# Altium PCB cs301_YourGroupNumber--4 holes.PcbDoc
Units mm, origin at the board's own origin, x right, y up, seen from the top; angles counter-clockwise.
Board outline 274.95 x 168.53 mm, 2 copper layers (Top Layer, Bottom Layer); 115 components, 69 nets, 362 pads, 0 vias.
Unrouted connection lines stored in the file: 224.
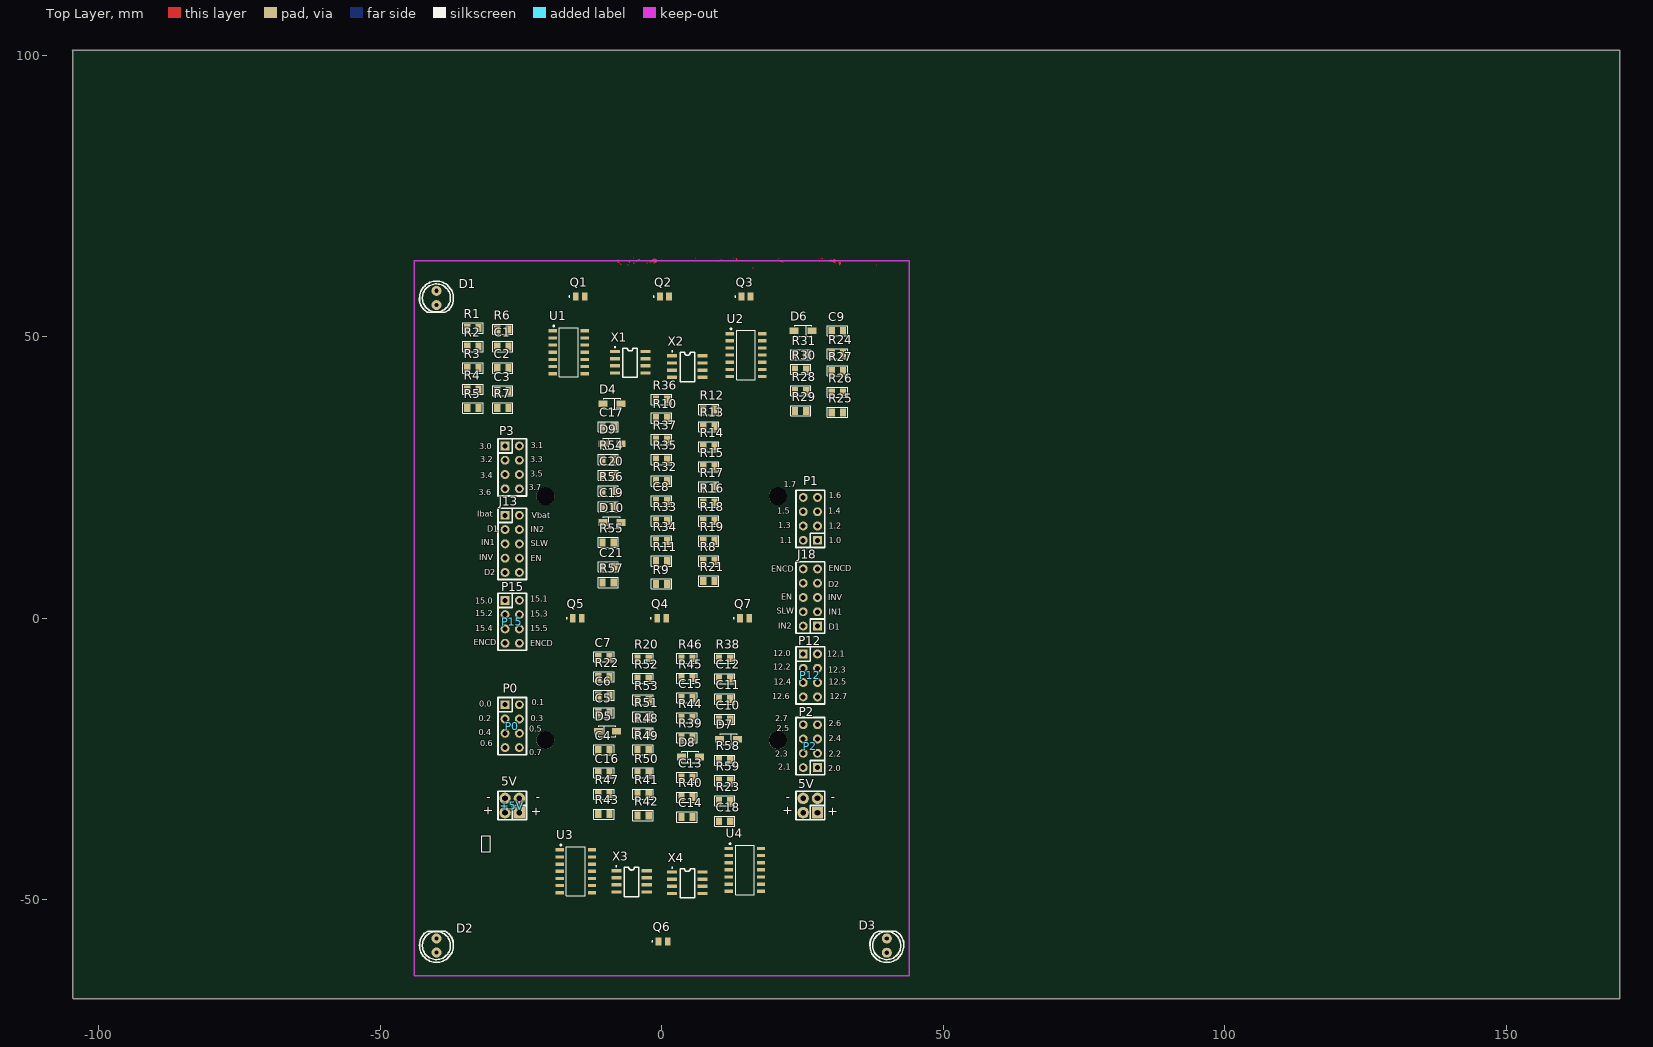
[diagram p0: Top Layer view]
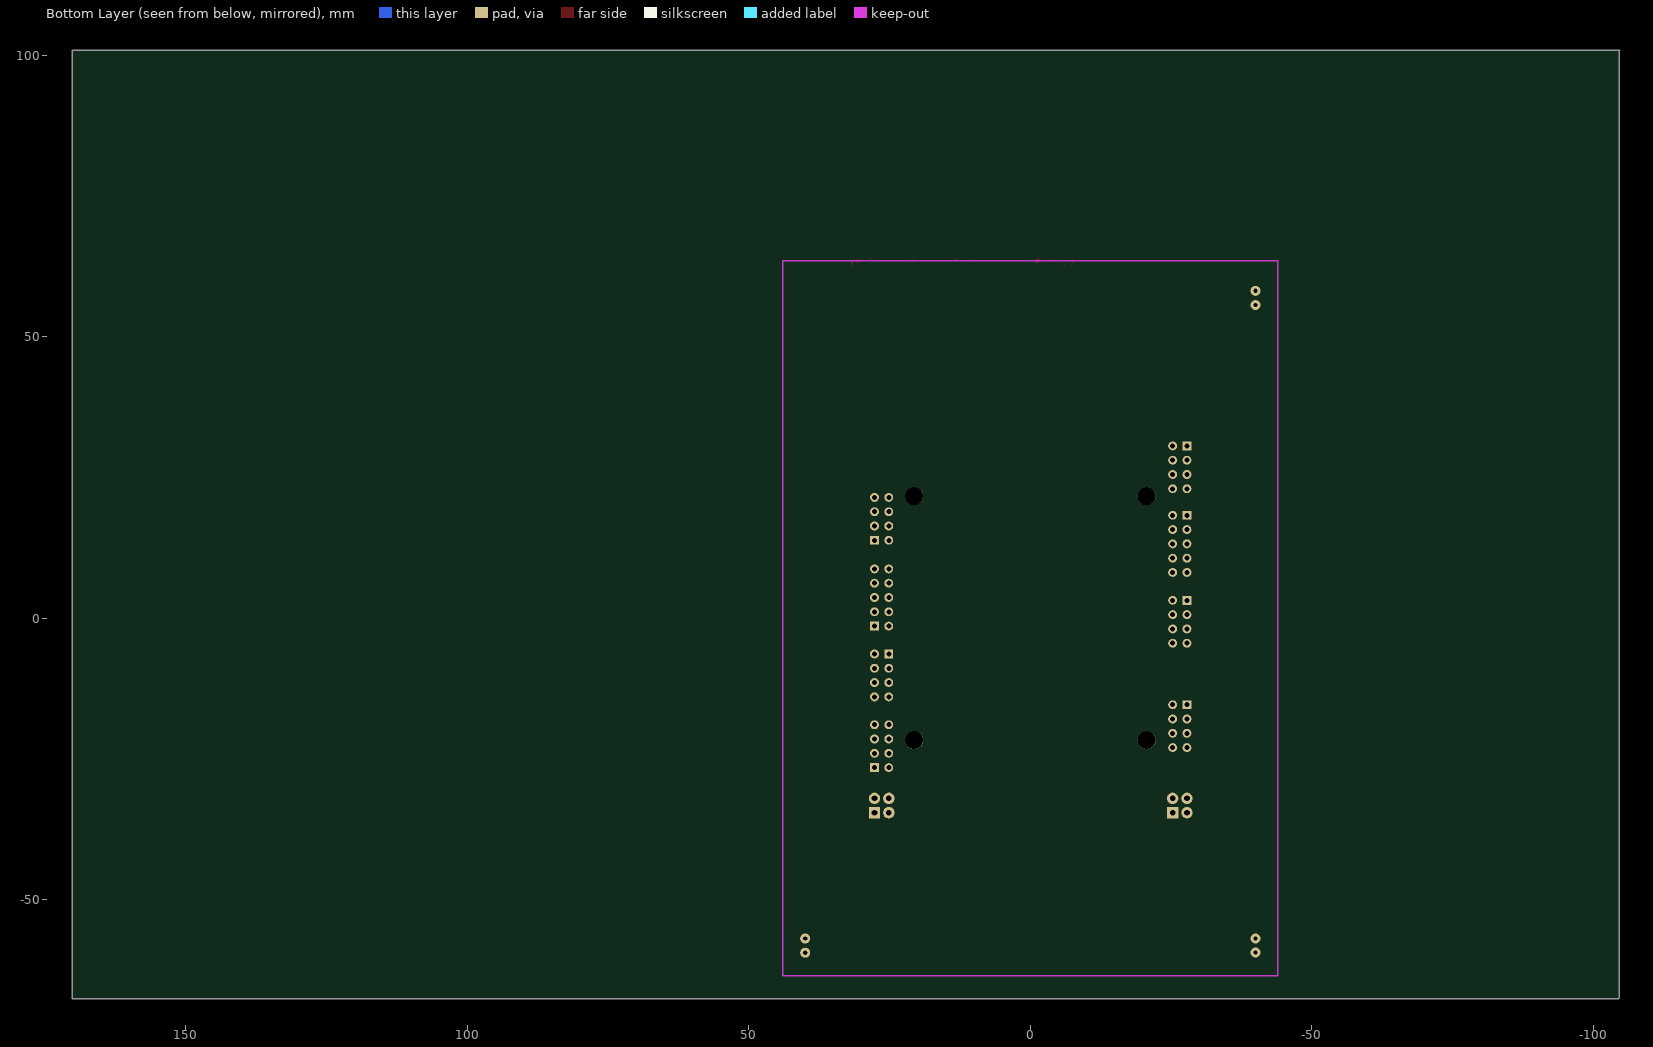
[diagram p1: Bottom Layer view, seen from below]

## Layer stack, top to bottom
Top Solder: solder mask 0.0102, Solder Resist, Dk 3.5
Top Layer: signal copper 0.0356
Dielectric1: dielectric 0.32, FR-4, Dk 4.8
Bottom Layer: signal copper 0.0356
Bottom Solder: solder mask 0.0102, Solder Resist, Dk 3.5

## Board outline
-104.6,-67.48 -104.473,-67.607 170.228,-67.607 170.228,100.922 -104.727,100.922 -104.6,100.795 -104.6,-67.48

## Design rules (kind name [scope] priority, off if disabled: settings)
Clearance [All] p1: gap=0.254 ignorepadtopadclearanceinfootprint=FALSE except(0: Arc-Hole Track-Hole SMDPad-Hole THPad-Hole Via-Hole Fill-Hole Poly-Hole Region-Hole Text-Hole)
PolygonConnect [All] p1: connectstyle=Relief reliefconductorwidth=0.508 reliefentries=4 polygonreliefangle="90 Angle" airgapwidth=0.254
RoutingVias [All] p1: holewidth=0.711 width=1.27 viastyle="Through Hole" minholewidth=0.711 minwidth=1.27 maxholewidth=0.711 maxwidth=1.27
SMDToCorner [All] p1: distance=157480
SilkToSolderMaskClearance SilkscreenOverComponentPads [IsPad] p1: minsilkscreentomaskgap=0.254 clearancetoexposedcopper=TRUE
SolderMaskExpansion [All] p1: expansion=0.102 istentingtop=FALSE
Width [All] p1: maxlimit=0.762 minlimit=0.254 preferedwidth=0.254 minimp=50.000000 maximp=50.000000 favimp=50.000000
29 further rules are at their usual default settings.

## Classes and differential pairs
component class Sensors: C7 C8 C9 C10 C11 C12 C13 C14 C15 C16 C17 C18 C19 C20 C21 D6 D7 D8 D9 D10 Q3 Q4 Q5 Q6 Q7 R20 R21 R22 R23 R24 R25 R26 R27 R28 R29 R30 R31 R32 R33 R34 R35 R36 R37 R38 R39 R40 R41 R42 R43 R44 R45 R46 R47 R48 R49 R50 R51 R52 R53 R54 R55 R56 R57 R58 R59 U2 U3 U4 X2 X3 X4

## Components (designator, comment, footprint, x,y, rotation, side; value= is the part's Value field where it differs from the comment)
5V "5V" IDC4 27.686,-34.544 r90 top locked
+5V "5V" IDC4 -25.273,-34.544 r90 top locked
C1 "*" "0805 CAP" -28.21,48.26 r0 top
C2 "*" "0805 CAP" -28.21,44.45 r0 top
C3 "*" "0805 CAP" -28.21,40.386 r0 top
C4 "*" "0805 CAP" -10.254,-23.368 r0 top
C5 "*" "0805 CAP" -10.254,-16.764 r0 top
C6 "*" "0805 CAP" -10.254,-13.716 r0 top
C7 "*" "0805 CAP" -10.254,-6.858 r0 top
C8 "*" "0805 CAP" -0.016,20.828 r0 top
C9 "*" "0805 CAP" 31.226,51.054 r0 top
C10 "*" "0805 CAP" 11.192,-17.97 r0 top
C11 "*" "0805 CAP" 11.192,-14.351 r0 top
C12 "*" "0805 CAP" 11.192,-10.731 r180 top
C13 "*" "0805 CAP" 4.504,-28.258 r0 top
C14 "*" "0805 CAP" 4.504,-35.306 r0 top
C15 "*" "0805 CAP" 4.504,-14.16 r0 top
C16 "*" "0805 CAP" -10.254,-27.432 r180 top
C17 "*" "0805 CAP" -9.492,34.036 r180 top
C18 "*" "0805 CAP" 11.192,-36.068 r0 top
C19 "*" "0805 CAP" -9.492,19.812 r0 top
C20 "*" "0805 CAP" -9.492,25.4 r180 top
C21 "*" "0805 CAP" -9.492,9.144 r180 top
D1 "LED" LED0.1/5MM#1 -40,55.62 r180 top locked
D2 "LED" LED0.1/5MM#2 -40,-56.88 r0 top locked
D3 "LED" LED0.1/5MM#1 40,-56.88 r0 top locked
D4 "BZT52H-B4V7" SOD123 -8.79,38.1 r0 top
D5 "BZT52H-B4V7" SOD123 -9.652,-20.066 r180 top
D6 "BZT52H-B4V7" SOD123 25.146,51.054 r0 top
D7 "BZT52H-B4V7" SOD123 11.894,-21.49 r0 top
D8 "BZT52H-B4V7" SOD123 5.106,-24.633 r180 top
D9 "BZT52H-B4V7" SOD123 -8.89,30.988 r180 top
D10 "BZT52H-B4V7" SOD123 -8.89,17.018 r180 top
J13 "CON10" IDC10 -27.813,18.288 r270 top locked
J18 "CON10" IDC10 27.686,-1.397 r90 top locked
P0 "P0" idc8 -27.813,-15.367 r270 top locked
P1 "P1" idc8 27.686,13.843 r90 top locked
P2 "P2" idc8 27.686,-26.543 r90 top locked
P3 "P3" idc8 -27.813,30.607 r270 top locked
P12 "P12" idc8 25.146,-6.35 r270 top locked
P15 "P15" IDC8 -27.813,3.175 r270 top locked
Q1 "TEMT6200FX01" XDCR_TEMT6200FX01 -14.478,57.15 r0 top locked
Q2 "TEMT6200FX01" XDCR_TEMT6200FX01 0.508,57.15 r0 top locked
Q3 "TEMT6200FX01" XDCR_TEMT6200FX01 14.986,57.15 r0 top locked
Q4 "TEMT6200FX01" XDCR_TEMT6200FX01 0,0 r0 top locked
Q5 "TEMT6200FX01" XDCR_TEMT6200FX01 -14.986,0 r0 top locked
Q6 "TEMT6200FX01" XDCR_TEMT6200FX01 0.254,-57.404 r0 top locked
Q7 "TEMT6200FX01" XDCR_TEMT6200FX01 14.732,0 r0 top locked
R1 "*" "0805 RES" -33.528,51.562 r180 top
R2 "*" "0805 RES" -33.528,48.26 r0 top
R3 "*" "0805 RES" -33.528,44.45 r180 top
R4 "*" "0805 RES" -33.528,40.64 r0 top
R5 "*" "0805 RES" -33.528,37.338 r0 top
R6 "*" "0805 RES" -28.21,51.308 r0 top
R7 "*" "0805 RES" -28.21,37.338 r0 top
R8 "*" "0805 RES" 8.382,10.16 r180 top
R9 "*" "0805 RES" -0.016,6.096 r0 top
R10 "*" "0805 RES" -0.016,35.56 r0 top
R11 "*" "0805 RES" -0.016,10.16 r0 top
R12 "*" "0805 RES" 8.382,37.084 r180 top
R13 "*" "0805 RES" 8.382,34.036 r180 top
R14 "*" "0805 RES" 8.382,30.48 r180 top
R15 "*" "0805 RES" 8.382,26.924 r180 top
R16 "*" "0805 RES" 8.382,20.574 r180 top
R17 "*" "0805 RES" 8.382,23.368 r180 top
R18 "*" "0805 RES" 8.382,17.272 r180 top
R19 "*" "0805 RES" 8.382,13.716 r180 top
R20 "*" "0805 RES" -3.302,-7.112 r180 top
R21 "*" "0805 RES" 8.382,6.604 r180 top
R22 "*" "0805 RES" -10.254,-10.414 r180 top
R23 "*" "0805 RES" 11.192,-32.448 r180 top
R24 "*" "0805 RES" 31.226,46.99 r180 top
R25 "*" "0805 RES" 31.226,36.576 r180 top
R26 "*" "0805 RES" 31.226,40.132 r180 top
R27 "*" "0805 RES" 31.226,43.942 r180 top
R28 "*" "0805 RES" 24.698,40.386 r0 top
R29 "*" "0805 RES" 24.698,36.83 r0 top
R30 "*" "0805 RES" 24.698,44.196 r180 top
R31 "*" "0805 RES" 24.698,46.82 r0 top
R32 "*" "0805 RES" -0.016,24.384 r0 top
R33 "*" "0805 RES" -0.016,17.272 r0 top
R34 "*" "0805 RES" -0.016,13.716 r180 top
R35 "*" "0805 RES" -0.016,28.194 r0 top
R36 "*" "0805 RES" -0.016,38.862 r0 top
R37 "*" "0805 RES" -0.016,31.75 r0 top
R38 "*" "0805 RES" 11.192,-7.112 r180 top
R39 "*" "0805 RES" 4.504,-21.209 r180 top
R40 "*" "0805 RES" 4.504,-31.782 r0 top
R41 "*" "0805 RES" -3.302,-31.242 r180 top
R42 "*" "0805 RES" -3.302,-35.052 r180 top
R43 "*" "0805 RES" -10.254,-34.798 r0 top
R44 "*" "0805 RES" 4.504,-17.685 r0 top
R45 "*" "0805 RES" 4.504,-10.636 r0 top
R46 "*" "0805 RES" 4.504,-7.112 r0 top
R47 "*" "0805 RES" -10.254,-31.242 r0 top
R48 "*" "0805 RES" -3.302,-20.32 r180 top
R49 "*" "0805 RES" -3.302,-23.368 r180 top
R50 "*" "0805 RES" -3.302,-27.432 r180 top
R51 "*" "0805 RES" -3.302,-17.526 r0 top
R52 "*" "0805 RES" -3.302,-10.668 r180 top
R53 "*" "0805 RES" -3.302,-14.478 r180 top
R54 "*" "0805 RES" -9.492,28.194 r180 top
R55 "*" "0805 RES" -9.492,13.462 r180 top
R56 "*" "0805 RES" -9.492,22.606 r180 top
R57 "*" "0805 RES" -9.492,6.35 r180 top
R58 "*" "0805 RES" 11.192,-25.209 r180 top
R59 "*" "0805 RES" 11.192,-28.829 r180 top
U1 "LM324DR2G" SOIC-14 -16.51,47.244 r0 top
U2 "LM324DR2G" SOIC-14 14.986,46.736 r0 top
U3 "LM324DR2G" SOIC-14 -15.24,-44.958 r0 top
U4 "LM324DR2G" SOIC-14 14.798,-44.704 r0 top
X1 "LM358" "SO - 8" -5.588,45.466 r0 top
X2 "LM358" "SO - 8" 4.572,44.704 r0 top
X3 "LM358" "SO - 8" -5.334,-46.736 r0 top
X4 "LM358" "SO - 8" 4.572,-46.99 r0 top

## Footprints (in the part's own frame and the unit in brackets; to place one, negate y for a bottom-side part, rotate by r counter-clockwise, add the part's x,y. Pads: shape width x height; smd on the part's side, far side on the other; paste and mask are expansions set on the pad)
"0805 CAP" [mm] "http://www.digikey.co.nz/Web%20Export/Supplier%20Content/Vishay_8026/PDF/VishayBeyschlag_SolderPad.pdf?redirected=1 with dimension G modified by +0.25mm"
  rect 1.1x1.4 smd: 1(-1,0) 2(1,0)
  silkscreen extent -1.8,-0.9 1.8,0.9, body extent -1.04,-0.66 1.04,0.66, height 0.61
"0805 RES" [mm] "http://www.digikey.co.nz/Web%20Export/Supplier%20Content/Vishay_8026/PDF/VishayBeyschlag_SolderPad.pdf?redirected=1 with dimension G modified by +0.25mm"
  rect 1.1x1.4 smd: 1(-1,0) 2(1,0)
  silkscreen extent -1.8,-0.9 1.8,0.9, body extent -1.04,-0.66 1.04,0.66, height 0.61
IDC4 [mil]
  rect 80x80 hole 40: 1(0,0)
  round 80 hole 40: 2(0,100) 3(100,0) 4(100,100)
  silkscreen extent -50,-50 150,150
idc8 [mil]
  rect 62x62 hole 35: 1(0,0)
  round 62 hole 35: 2(0,100) 3(100,0) 4(100,100) 5(200,0) 6(200,100) 7(300,0) 8(300,100)
  silkscreen extent -50,-50 350,150
IDC8 [mil]
  rect 62x62 hole 35: 1(0,0)
  round 62 hole 35: 2(0,100) 3(100,0) 4(100,100) 5(200,0) 6(200,100) 7(300,0) 8(300,100)
  silkscreen extent -50,-50 350,150
IDC10 [mil]
  rect 62x62 hole 35: 1(0,0)
  round 62 hole 35: 2(0,100) 3(100,0) 4(100,100) 5(200,0) 6(200,100) 7(300,0) 8(300,100) 9(400,0) 10(400,100)
  silkscreen extent -50,-50 450,150
LED0.1/5MM#1 [mil]
  round 70 hole 30: A(0,0) K(0,-100)
  silkscreen extent -118,-168 118,50
LED0.1/5MM#2 [mil]
  round 70 hole 30: A(0,0) K(0,-98.42)
  silkscreen extent -118,-168 118,50
"SO - 8" [mm]
  rect 1.8x0.6 smd: 1(-2.7,1.905) 2(-2.7,0.635) 3(-2.7,-0.635) 4(-2.7,-1.905) 5(2.7,-1.905) 6(2.7,-0.635) 7(2.7,0.635) 8(2.7,1.905)
  silkscreen extent -2.8,-2.7 1.3,2.8, body extent -3.1,-2.5 3.1,2.5, height 1.8
SOD123 [mm] "SOD-123; 2 Leads; Body 2.7 x 1.6 mm, (LxW)"
  rect 1.6x1.2 smd: 1(-1.65,0) 2(1.55,0)
  silkscreen extent -1.5,-1 1.5,1, body extent -1.8,-0.86 1.8,0.86, height 1.21
SOIC-14 [mm] "SOIC, 14-Leads, Body 8.75x4mm, Pitch 1.27mm"
  rect 1.48x0.58 smd: 1(-2.86,3.81) 2(-2.86,2.54) 3(-2.86,1.27) 4(-2.86,0) 5(-2.86,-1.27) 6(-2.86,-2.54) 7(-2.86,-3.81) 8(2.86,-3.81) 9(2.86,-2.54) 10(2.86,-1.27) 11(2.86,0) 12(2.86,1.27) 13(2.86,2.54) 14(2.86,3.81)
  silkscreen extent -2.78,-4.38 1.67,4.77, body extent -3.1,-4.38 3.1,4.37, height 1.75
XDCR_TEMT6200FX01 [mm]
  rect 1x1.45 smd: C(0.8,0) E(-0.8,0)
  silkscreen extent -2,-0.11 -1.8,0.09, body extent -1,-0.63 1,0.63, height 0.85

## Part data
5V +5V: library part CON4, "Connector"
C1 C2 C3 C4 C5 C6 C7 C8 C9 C10 C11 C12 C13 C14 C15 C16 C17 C18 C19 C20 C21: library part CerCap_SMT_0805, "SMT ceramic capacitor 0805 size"
D4 D5 D6 D7 D8 D9 D10: library part Zener_SMT_SOD123, "SMT zener diode with SOD123 package", Manufacturer="Nexperia USA Inc.", Manufacturer Part Number=BZT52H-B4V7,115, Operating Temperature="-65°C ~ 150°C (TA)", Package / Case=SOD-123F, Supplier Part Number 1=1727-1611-1-ND, Tolerance=±2%, Category="Discrete Semiconductor Products", ComponentLink1Description=https://assets.nexperia.com/documents/data-sheet/BZT52H_SER.pdf, ComponentLink1URL=https://assets.nexperia.com/documents/data-sheet/BZT52H_SER.pdf, Mounting Type="Surface Mount", Packaging="Cut Tape (CT)", Part Status=Active, Pricing 1="1=0.51, 10=0.408, 100=0.2164, 500=0.14232, 1000=0.09678 (NZD)", RoHS="RoHS Compliant", Stock 1=0, Supplier 1=Digi-Key, Supplier Device Package=SOD-123F
J13 J18: "Connector"
P0 P1 P2 P3: library part CON8, "Connector"
P12 P15: library part CON8_1, "Connector"
Q1 Q2 Q3 Q4 Q5 Q6 Q7: "Phototransistors 550nm Top View 0805 (2012 Metric)", Package="0805 Vishay Semiconductor", Availability=Good, Check_prices=https://www.snapeda.com/parts/TEMT6200FX01/Vishay%20Semiconductor%20Opto%20Division/view-part/43955/?ref=eda, MF="Vishay Semiconductor", MP=TEMT6200FX01, Price=None, Purchase-URL=https://pricing.snapeda.com/search/part/TEMT6200FX01/?ref=eda, SnapEDA_Link=https://www.snapeda.com/parts/TEMT6200FX01/Vishay%20Semiconductor%20Opto%20Division/view-part/43955/?ref=snap
R1 R2 R3 R4 R5 R6 R7 R8 R9 R10 R11 R12 R13 R14 R15 R16 R17 R18 R19 R20 R21 R22 R23 R24 R25 R26 R27 R28 R29 R30 R31 R32 R33 R34 R35 R36 R37 R38 R39 R40 R41 R42 R43 R44 R45 R46 R47 R48 R49 R50 R51 R52 R53 R54 R55 R56 R57 R58 R59: library part Res_SMT_0805, "0805 resistor", ComponentLink1Description=https://nz.mouser.com/datasheet/2/315/AOA0000C304-1149620.pdf, LatestRevisionDate=17-Jul-2002, LatestRevisionNote="Re-released for DXP Platform.", PackageReference=AXIAL-0.4, Published=8-Jun-2000, Publisher="Altium Limited"
U1 U2 U3 U4: library part LM324DR_SMT_SOIC16, "Single Supply Quad Operational Amplifier, 3 to 32 V, 0 to 70 degC, 14-Pin SOIC, Pb-Free, Tape and Reel", Manufacturer="On Semiconductor", ComponentLink1Description="Manufacturer URL", ComponentLink1URL=http://www.onsemi.com/, ComponentLink2Description=Datasheet, ComponentLink2URL=http://www.onsemi.cn/pub_link/Collateral/LM324-D.PDF, ComponentLink3Description="Package Specification", ComponentLink3URL=http://www.onsemi.com/pub_link/Collateral/751A-03.PDF, DatasheetVersion="Rev. 25", Mounting Technology="Surface Mount", PackageDescription="14-Pin Small Outline Integrated Circuit, Body 8.65 x 3.9 mm, Pitch 1.27 mm", PackageReference=SOIC-14-751A-03, PackageVersion="Rev. K, 05/2011", Packing="Tape and Reel", PartNumber=LM324DR2G, RoHS=TRUE, VCC Max (V)=32, VCC Min (V)=3
X1 X2 X3 X4: library part LM358_SMT_SOIC8, "IC OPAMP 8SOIC", Supplier Part Number 1=296-1014-1-ND, ComponentLink1Description=http://www.ti.com/lit/ds/symlink/tlc080a.pdf, ComponentLink1URL=http://www.ti.com/lit/ds/symlink/tlc080a.pdf, Supplier 1=Digi-Key

## Free pads (board coordinates)
  round 3.2 hole 3.2 unplated: 1(-20.65,-21.666) 1(-20.65,21.666) 1(20.65,-21.666) 1(20.65,21.666)

## Nets (pads, with @x,y where several pads share a name; then routed paths per layer and width w, separated by ;. In a path a pad name is that pad's centre, name@x,y a point inside that pad or via, vN(x,y) a via of type N, cw(c..) or ccw(c..) an arc to the next point about the centre after c; other vN are vias at no path point)
+5V: 5V.1 5V.2 +5V.1 +5V.2 J13.9 J18.7 Q1.C Q2.C Q3.C Q4.C Q5.C Q6.C Q7.C R9.1 R11.1 R12.1 R16.1 R20.1 R21.1 R25.1 R29.1 R36.1 R37.1 R41.1 R45.1 R52.1 R56.1 U1.4 U2.4 U3.4 U4.4 X1.8 X2.8 X3.8 X4.8
GND: 5V.3 5V.4 +5V.3 +5V.4 C2.2 C3.2 C5.2 C6.2 C9.2 C10.2 C11.2 C12.2 C15.2 C16.2 C17.2 C18.2 C20.2 C21.2 R1.2 R3.1 R4.1 R5.1 R10.2 R13.2 R15.2 R17.1 R18.1 R19.1 R22.2 R24.2 R26.2 R28.2 R30.1 R31.1 R32.1 R33.1 R34.1 R35.1 R38.2 R40.2 R42.2 R44.2 R46.1 R47.1 R48.1 R49.1 R50.1 R51.1 R53.2 R55.2 R57.1 R58.1 R59.1 U1.11 U2.11 U3.11 U4.11 X1.4 X2.4 X3.4 X4.4
NetC1_1: C1.1 U1.1 U1.2
NetC1_2: C1.2 D4.1 R3.2
NetC2_1: C2.1 D4.2 R4.2 U1.5
NetC3_1: C3.1 R11.2 X1.1
NetC4_1: C4.1 U1.8 U1.9
NetC4_2: C4.2 D5.1 R17.2
NetC5_1: C5.1 D5.2 R18.2 U1.12
NetC6_1: C6.1 R16.2 X1.7
NetC7_1: C7.1 U2.8 U2.9
NetC7_2: C7.2 D6.1 R30.2
NetC8_1: C8.1 U2.1 U2.2
NetC8_2: C8.2 D7.1 R32.2
NetC9_1: C9.1 D6.2 R31.2 U2.12
NetC10_1: C10.1 R25.2 X2.7
NetC11_1: C11.1 D7.2 R33.2 U2.5
NetC12_1: C12.1 R29.2 X2.1
NetC13_1: C13.1 U3.8 U3.9
NetC13_2: C13.2 D8.1 R46.2
NetC14_1: C14.1 U3.1 U3.2
NetC14_2: C14.2 D9.1 R48.2
NetC15_1: C15.1 D8.2 R47.2 U3.12
NetC16_1: C16.1 R41.2 X3.7
NetC17_1: C17.1 D9.2 R49.2 U3.5
NetC18_1: C18.1 R45.2 X3.1
NetC19_1: C19.1 U4.1 U4.2
NetC19_2: C19.2 D10.1 R57.2
NetC20_1: C20.1 D10.2 R58.2 U4.5
NetC21_1: C21.1 R56.2 X4.1
NetD1_A: D1.A R6.1
NetD2_A: D2.A R7.1
NetD3_A: D3.A R8.1
NetJ13_3: J13.3 P3.4
NetJ13_4: J13.4 P3.6
NetJ13_5: J13.5 P3.5
NetJ13_7: J13.7 P3.8
NetJ18_1: J18.1 P1.3
NetJ18_2: J18.2 P1.6
NetJ18_3: J18.3 P1.5
NetJ18_5: J18.5 P1.8
NetQ1_E: Q1.E R5.2 U1.3
NetQ2_E: Q2.E R19.2 U1.10
NetQ3_E: Q3.E R35.2 U2.3
NetQ4_E: Q4.E R34.2 U2.10
NetQ5_E: Q5.E R51.2 U3.3
NetQ6_E: Q6.E R50.2 U3.10
NetQ7_E: Q7.E R59.2 U4.3
NetR1_1: R1.1 R2.2 U1.6
NetR2_1: R2.1 U1.7 X1.3
NetR9_2: R9.2 R10.1 X1.2
NetR12_2: R12.2 R15.1 X1.6
NetR13_1: R13.1 R14.2 U1.13
NetR14_1: R14.1 U1.14 X1.5
NetR20_2: R20.2 R24.1 X2.6
NetR21_2: R21.2 R28.1 X2.2
NetR22_1: R22.1 R23.2 U2.13
NetR23_1: R23.1 U2.14 X2.5
NetR26_1: R26.1 R27.2 U2.6
NetR27_1: R27.1 U2.7 X2.3
NetR36_2: R36.2 R40.1 X3.6
NetR37_2: R37.2 R44.1 X3.2
NetR38_1: R38.1 R39.2 U3.13
NetR39_1: R39.1 U3.14 X3.5
NetR42_1: R42.1 R43.2 U3.6
NetR43_1: R43.1 U3.7 X3.3
NetR52_2: R52.2 R55.1 X4.2
NetR53_1: R53.1 R54.2 U4.6
NetR54_1: R54.1 U4.7 X4.3
pads on no net: D1.K D2.K D3.K J13.1 J13.2 J13.6 J13.8 J13.10 J18.4 J18.6 J18.8 J18.9 J18.10 P0.1 P0.2 P0.3 P0.4 P0.5 P0.6 P0.7 P0.8 P1.1 P1.2 P1.4 P1.7 P2.1 P2.2 P2.3 P2.4 P2.5 P2.6 P2.7 P2.8 P3.1 P3.2 P3.3 P3.7 P12.1 P12.2 P12.3 P12.4 P12.5 P12.6 P12.7 P12.8 P15.1 P15.2 P15.3 P15.4 P15.5 P15.6 P15.7 P15.8 R6.2 R7.2 R8.2 U4.8 U4.9 U4.10 U4.12 U4.13 U4.14 X4.5 X4.6 X4.7

## Keep-outs
Keep-Out Layer:
  lines w0.254: -43.942,-63.5 -43.942,63.5 43.942,63.5 43.942,-63.5 -43.942,-63.5

## Other copper
Top Layer:
  region: -5.702,63.462 -5.702,63.405 -5.759,63.405 -5.759,63.462
  region: -7.703,63.405 -7.703,63.462 -7.645,63.462 -7.645,63.405
  region: -4.388,63.462 -4.388,63.405 -4.445,63.405 -4.445,63.462
  region: -0.044,63.576 -0.102,63.576 -0.102,63.633 -0.044,63.633
  region: -5.016,63.976 -5.074,63.976 -5.074,64.033 -5.016,64.033
  region: -7.588,63.348 -7.588,63.29 -7.645,63.29 -7.645,63.348
  region: 14.072,63.519 14.014,63.519 14.014,63.576 14.072,63.576
  region: 10.071,63.348 10.071,63.29 10.014,63.29 10.014,63.348
  region: -7.76,63.348 -7.817,63.348 -7.817,63.405 -7.76,63.405
  region: 12.814,63.976 12.757,63.976 12.757,64.033 12.814,64.033
  region: 16.243,62.262 16.243,62.205 16.186,62.205 16.186,62.262
  region: -7.645,63.119 -7.703,63.119 -7.703,63.176 -7.645,63.176
  region: -7.76,63.233 -7.76,63.29 -7.703,63.29 -7.703,63.176 -7.76,63.176
  region: -5.817,63.405 -5.759,63.405 -5.759,63.348 -5.817,63.348
  region: 14.357,63.691 14.357,63.633 14.3,63.633 14.3,63.691
  region: 14.929,61.862 14.929,61.919 14.986,61.919 14.986,61.862
  region: 21.044,63.405 21.044,63.348 20.987,63.348 20.987,63.405
  region: 9.842,63.005 9.9,63.005 9.9,62.948 9.842,62.948
  region: -7.76,63.576 -7.76,63.691 -7.703,63.691 -7.703,63.519 -7.76,63.519
  region: 10.585,63.748 10.585,63.691 10.528,63.691 10.528,63.748
  region: -4.902,63.119 -4.902,63.062 -4.959,63.062 -4.959,63.119
  region: 13.386,63.919 13.386,63.805 13.443,63.805 13.443,63.748 13.386,63.748 13.386,63.691 13.329,63.691 13.329,63.919
  region: 28.302,63.919 28.245,63.919 28.245,63.976 28.359,63.976 28.359,63.862 28.302,63.862
  region: -3.931,63.691 -4.045,63.691 -4.045,63.748 -3.931,63.748
  region: 13.214,63.805 13.214,63.919 13.271,63.919 13.271,63.691 13.214,63.691 13.214,63.748
  region: -3.873,63.748 -3.931,63.748 -3.931,63.805 -3.816,63.805 -3.816,63.748
  region: 28.531,63.919 28.588,63.919 28.588,63.862 28.531,63.862
  region: 21.558,63.233 21.615,63.233 21.615,63.176 21.558,63.176
  region: -5.759,63.233 -5.702,63.233 -5.702,63.176 -5.759,63.176
  region: 13.271,63.633 13.271,63.691 13.329,63.691 13.329,63.519 13.271,63.519 13.271,63.576
  region: -7.417,63.005 -7.474,63.005 -7.474,63.062 -7.417,63.062
  region: 10.185,63.405 10.128,63.405 10.128,63.462 10.185,63.462
  region: 14.3,63.576 14.357,63.576 14.357,63.519 14.243,63.519 14.243,63.576
  region: 20.587,63.691 20.587,63.748 20.644,63.748 20.644,63.691
  region: -4.274,63.576 -4.216,63.576 -4.216,63.519 -4.274,63.519 -4.274,63.462 -4.331,63.462 -4.331,63.519 -4.274,63.519
  region: -7.531,63.176 -7.588,63.176 -7.588,63.233 -7.531,63.233
  region: -7.302,62.833 -7.302,62.89 -7.245,62.89 -7.245,62.833 -7.188,62.833 -7.188,62.776 -7.245,62.776 -7.245,62.833
  region: 16.072,63.919 16.072,63.976 16.129,63.976 16.129,63.919
  region: -6.045,62.719 -6.045,62.776 -5.931,62.776 -5.931,62.719 -5.988,62.719
  region: 5.956,64.033 6.013,64.033 6.013,63.976 5.956,63.976
  region: -7.302,62.948 -7.302,62.89 -7.36,62.89 -7.36,62.948 -7.417,62.948 -7.417,63.005 -7.36,63.005 -7.36,62.948
  region: -1.359,63.119 -1.359,63.176 -1.302,63.176 -1.302,63.062 -1.359,63.062
  region: -2.559,63.176 -2.559,63.005 -2.616,63.005 -2.616,63.062 -2.673,63.062 -2.673,63.119 -2.616,63.119 -2.616,63.176
  region: -4.445,63.405 -4.445,63.348 -4.502,63.348 -4.502,63.405
  region: -2.102,63.176 -2.102,63.29 -2.045,63.29 -2.045,63.119 -2.102,63.119
  region: 31.788,63.29 31.788,63.233 31.845,63.233 31.845,63.062 31.788,63.062 31.788,62.948 31.731,62.948 31.731,62.833 31.674,62.833 31.674,62.719 31.559,62.719 31.559,63.005 31.502,63.005 31.502,63.176 31.559,63.176 31.559,63.348 31.617,63.348 31.617,63.462 31.731,63.462 31.731,63.348 31.788,63.348
  region: -4.102,63.691 -4.045,63.691 -4.045,63.633 -4.102,63.633 -4.102,63.576 -4.216,63.576 -4.216,63.633 -4.102,63.633
  region: 29.845,63.462 29.845,63.576 29.959,63.576 29.959,63.405 29.845,63.405
  region: 20.815,63.919 20.872,63.919 20.872,63.862 20.815,63.862
  region: 21.558,63.29 21.558,63.233 21.501,63.233 21.501,63.29 21.444,63.29 21.444,63.348 21.273,63.348 21.273,63.405 21.044,63.405 21.044,63.462 21.444,63.462 21.444,63.405 21.501,63.405 21.501,63.348 21.558,63.348
  region: 13.043,63.919 13.1,63.919 13.1,63.862 13.043,63.862
  region: 0.927,63.176 0.927,63.119 0.87,63.119 0.87,63.176
  region: -5.074,63.005 -5.074,63.062 -5.016,63.062 -5.016,63.005
  region: -1.816,63.405 -1.816,63.233 -1.873,63.233 -1.873,63.462 -1.816,63.462
  region: 30.874,63.576 30.874,63.062 30.817,63.062 30.817,63.119 30.702,63.119 30.702,63.176 30.645,63.176 30.645,63.233 30.531,63.233 30.531,63.29 30.416,63.29 30.416,63.348 30.302,63.348 30.302,63.405 30.188,63.405 30.188,63.462 30.074,63.462 30.074,63.633 30.131,63.633 30.131,63.576 30.245,63.576 30.245,63.519 30.416,63.519 30.416,63.576 30.474,63.576 30.474,63.633 30.531,63.633 30.531,63.748 30.645,63.748 30.645,63.805 30.759,63.805 30.759,63.633 30.874,63.633
  region: 27.788,63.862 27.788,63.919 27.845,63.919 27.845,63.862
  region: 10.014,62.948 9.957,62.948 9.957,63.005 10.014,63.005
  region: -1.13,63.805 -1.016,63.805 -1.016,63.748 -0.959,63.748 -0.959,63.691 -0.902,63.691 -0.902,63.576 -0.845,63.576 -0.845,63.462 -0.902,63.462 -0.902,63.348 -0.959,63.348 -0.959,63.176 -1.016,63.176 -1.016,63.233 -1.073,63.233 -1.073,63.176 -1.187,63.176 -1.187,63.348 -1.245,63.348 -1.245,63.29 -1.302,63.29 -1.302,63.233 -1.359,63.233 -1.359,63.462 -1.187,63.462 -1.187,63.576 -1.245,63.576 -1.245,63.633 -1.187,63.633 -1.187,63.691 -1.416,63.691 -1.416,63.633 -1.473,63.633 -1.473,63.576 -1.53,63.576 -1.53,63.519 -1.587,63.519 -1.587,63.348 -1.645,63.348 -1.645,63.405 -1.702,63.405 -1.702,63.462 -1.759,63.462 -1.759,63.576 -1.702,63.576 -1.702,63.633 -1.645,63.633 -1.645,63.691 -1.587,63.691 -1.587,63.748 -1.473,63.748 -1.473,63.805 -1.359,63.805 -1.359,63.862 -1.13,63.862
  region: 38.189,62.719 38.132,62.719 38.132,62.776 38.189,62.776

## Silkscreen, mask and mechanical layers (free items; w line width, h text height)
Top Overlay:
  text "3.1" at -23.241,30.226 h1.02
  text "3.0" at -32.385,29.972 h1.02
  text "3.2" at -32.258,27.686 h1.02
  text "3.3" at -23.368,27.686 h1.02
  text "3.5" at -23.368,25.146 h1.02
  text "3.4" at -32.258,24.892 h1.02
  text "1.7" at 21.717,23.241 h1.02
  text "3.7" at -23.622,22.733 h1.02
  text "3.6" at -32.512,21.844 h1.02
  text "1.6" at 29.718,21.336 h1.02
  text "1.5" at 20.574,18.542 h1.02
  text "1.4" at 29.591,18.542 h1.02
  text "Ibat" at -32.766,18.034 h1.02
  text "Vbat" at -23.114,17.78 h1.02
  text "1.3" at 20.701,16.002 h1.02
  text "1.2" at 29.718,15.875 h1.02
  text "D1" at -30.988,15.367 h1.02
  text "IN2" at -23.241,15.24 h1.02
  text "1.1" at 20.955,13.335 h1.02
  text "1.0" at 29.718,13.335 h1.02
  text "IN1" at -32.004,12.954 h1.02
  text "SLW" at -23.241,12.827 h1.02
  text "INV" at -32.385,10.287 h1.02
  text "EN" at -23.241,10.16 h1.02
  text "ENCD" at 29.718,8.382 h1.02
  text "ENCD" at 19.431,8.255 h1.02
  text "D2" at -31.496,7.62 h1.02
  text "D2" at 29.591,5.461 h1.02
  text "EN" at 21.209,3.302 h1.02
  text "INV" at 29.591,3.175 h1.02
  text "15.1" at -23.368,2.921 h1.02
  text "15.0" at -33.147,2.54 h1.02
  text "SLW" at 20.447,0.762 h1.02
  text "IN1" at 29.718,0.635 h1.02
  text "15.2" at -33.147,0.381 h1.02
  text "15.3" at -23.368,0.254 h1.02
  text "IN2" at 20.701,-1.905 h1.02
  text "D1" at 29.718,-2.032 h1.02
  text "15.4" at -33.147,-2.286 h1.02
  text "15.5" at -23.368,-2.286 h1.02
  text "ENCD" at -33.401,-4.826 h1.02
  text "ENCD" at -23.368,-4.953 h1.02
  text "12.0" at 19.812,-6.731 h1.02
  text "12.1" at 29.464,-6.858 h1.02
  text "12.2" at 19.812,-9.144 h1.02
  text "12.3" at 29.591,-9.652 h1.02
  text "12.4" at 19.939,-11.811 h1.02
  text "12.5" at 29.718,-11.811 h1.02
  text "12.6" at 19.685,-14.351 h1.02
  text "12.7" at 29.845,-14.351 h1.02
  text "0.1" at -23.114,-15.494 h1.02
  text "0.0" at -32.385,-15.748 h1.02
  text "0.2" at -32.512,-18.288 h1.02
  text "0.3" at -23.241,-18.288 h1.02
  text "2.7" at 20.193,-18.288 h1.02
  text "2.6" at 29.718,-19.177 h1.02
  text "2.5" at 20.447,-20.066 h1.02
  text "0.5" at -23.495,-20.193 h1.02
  text "0.4" at -32.512,-20.828 h1.02
  text "2.4" at 29.718,-21.844 h1.02
  text "0.6" at -32.258,-22.733 h1.02
  text "0.7" at -23.495,-24.384 h1.02
  text "2.3" at 20.193,-24.638 h1.02
  text "2.2" at 29.718,-24.638 h1.02
  text "2.1" at 20.701,-26.924 h1.02
  text "2.0" at 29.591,-27.178 h1.02
  text "-" at -30.353,-31.242 h1.52 r180
  text "-" at -21.59,-31.242 h1.52 r180
  text "-" at 22.86,-31.242 h1.52 r180
  text "-" at 30.861,-31.242 h1.52 r180
  text "+" at -30.099,-35.052 h1.52 r90
  text "+" at 23.114,-35.052 h1.52 r90
  text "+" at -21.59,-35.306 h1.52 r90
  text "+" at 31.115,-35.306 h1.52 r90
  text "" at -32.258,-41.148 h2.54